# EAGLE board IR_BEACON (EAGLE 6.5.0)
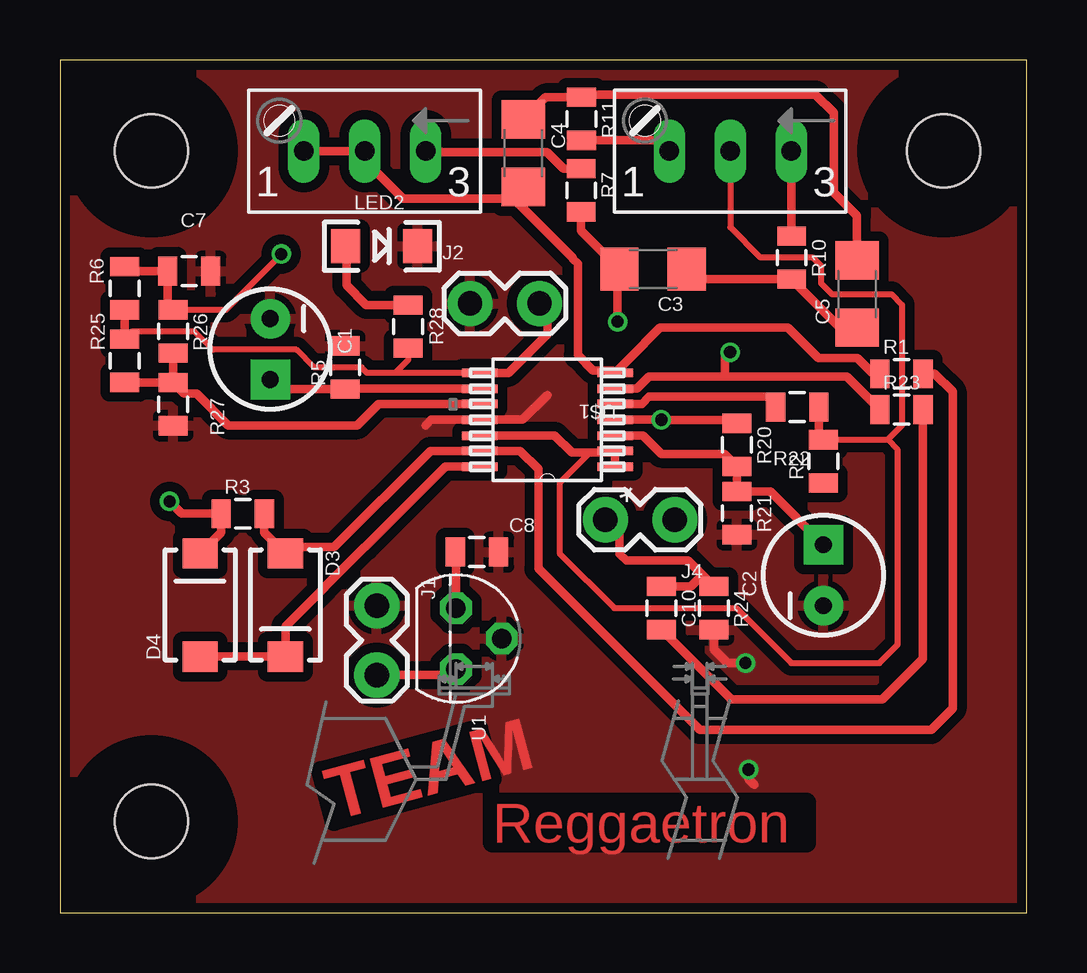
[diagram p0: board, top side]
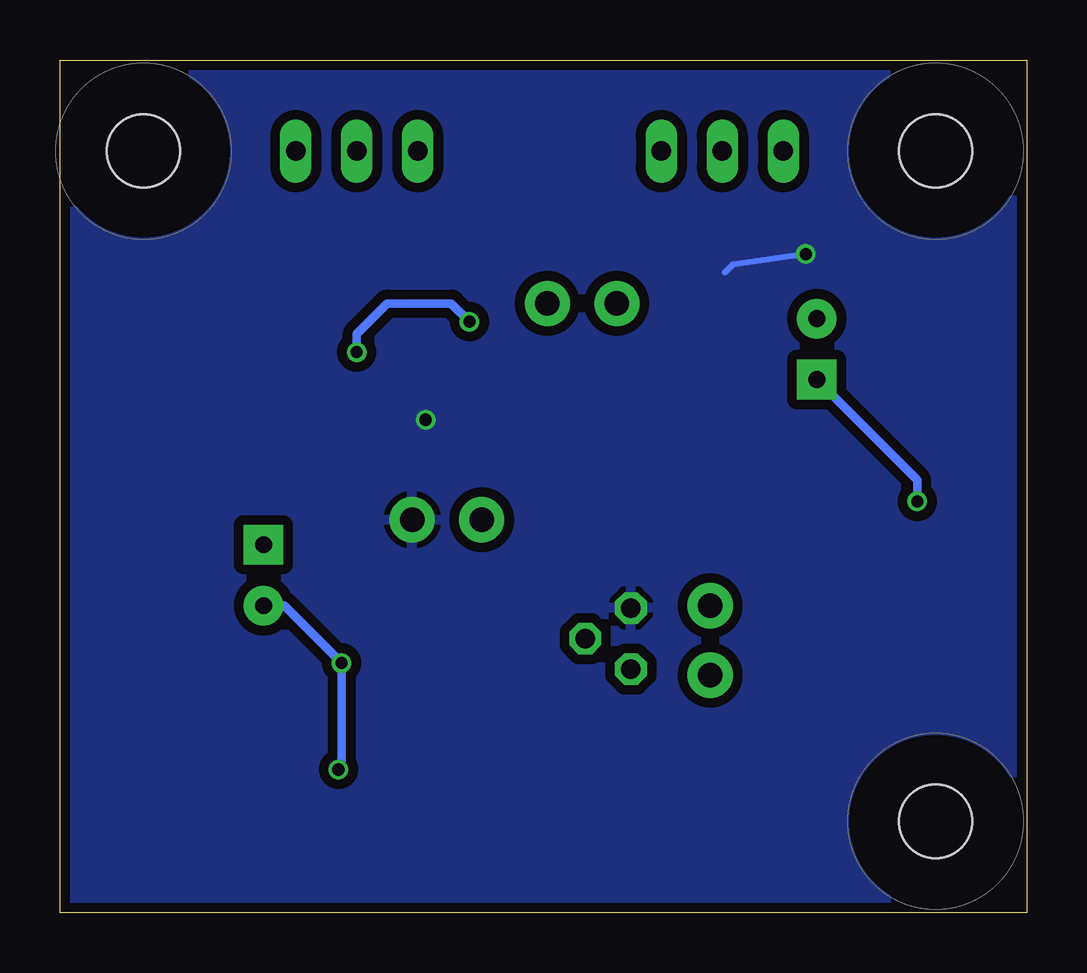
[diagram p1: board, bottom side, seen from below]

Size 40.31 x 35.55 mm. Coordinates in mm from the lower left corner, seen from the top.
Outline: 0,0 40.31,0 40.31,35.55 0,35.55 0,0
Copper layers (1*16): Top 0.035mm / dielectric 1.5mm / Bottom 0.035mm
Design rules "ITEADstudio_DRC": minimum track width 6mil, minimum drill 12mil, track to track 6mil, track to pad 6mil, pad to pad 6mil, via to via 6mil, smd to smd 0mil, copper to edge 10mil, drill to drill 10mil, minimum pad ring 10mil, minimum via ring 6mil, stop-mask expansion 2mil, vias tented up to drill 100mil, thermal gap 10mil

## Footprints (pad centres in the part's own frame; a part is rotated, then mirrored left to right if it is on the bottom)
S64W = drill 0.813 long: A 2.54,1.27; E -2.54,1.27; S 0,1.27
CPOL-RADIAL-10UF-25V = drill 0.7 pad 1.651 square: 1 1.27,0 | drill 0.7 pad 1.651: 2 -1.27,0
1206 = smd 1.6 x 1.8: 1 -1.4,0; 2 1.4,0
0805 = smd 0.8 x 1.2: 1 -0.9,0; 2 0.9,0
SMA-DIODE = smd 1.27 x 1.47: A -2.15,0; C 2.15,0
1X02_LOCK = drill 1.016 pad 1.88: 1 -0.178,0; 2 2.718,0
STAND-OFF-TIGHT = hole 3.048: 0,0
LED-1206 = smd 1.2 x 1.4: A -1.5,0; C 1.5,0
TO92 = drill 0.813 octagon: 1 -1.27,0; 2 0,1.905; 3 1.27,0
TSSOP14_MC = smd 1.473 x 0.356: 1 -2.819,1.956; 2 -2.819,1.295; 3 -2.819,0.66; 4 -2.819,0; 5 -2.819,-0.66; 6 -2.819,-1.295; 7 -2.819,-1.956; 8 2.819,-1.956; 9 2.819,-1.295; 10 2.819,-0.66; 11 2.819,0; 12 2.819,0.66; 13 2.819,1.295; 14 2.819,1.956

## Placement (x,y rotation side)
1K  [S64W]  27.94,33.02 180 top
10K  [S64W]  12.7,33.02 180 top
C1  [CPOL-RADIAL-10UF-25V]  8.76,23.5 270 top
C2  [CPOL-RADIAL-10UF-25V]  31.83,14.07 90 top
C3  47nF  [1206]  24.72,26.83 180 top
C4  47nF  [1206]  19.32,31.66 270 top
C5  47nF  [1206]  33.23,25.79 90 top
C7  .1uF  [0805]  5.38,26.75 0 top
C8  2.2uF  [0805]  17.38,15.04 0 top
C10  100nF  [0805]  25.07,12.7 270 top
D3  DIODE-SCHOTTKY_  [SMA-DIODE]  9.4,12.83 270 top
D4  DIODE-SCHOTTKY_  [SMA-DIODE]  5.84,12.83 90 top
J1  [1X02_LOCK]  13.21,12.62 270 top
J2  [1X02_LOCK]  17.27,25.4 0 top
J4  [1X02_LOCK]  25.45,16.38 180 top
JP1  STAND-OFFTIGHT  [STAND-OFF-TIGHT]  3.81,31.75 0 top
JP3  STAND-OFFTIGHT  [STAND-OFF-TIGHT]  3.81,3.81 0 top
JP5  STAND-OFFTIGHT  [STAND-OFF-TIGHT]  36.83,31.75 0 top
LED2  [LED-1206]  13.41,27.79 0 top
R1  10k  [0805]  35.08,22.47 0 top
R2  10k  [0805]  31.82,18.82 90 top
R3  10k  [0805]  7.62,16.64 0 top
R5  10k  [0805]  11.89,22.73 90 top
R6  3.9k  [0805]  2.7,26.04 270 top
R7  10k  [0805]  21.73,30.12 270 top
R10  100  [0805]  30.5,27.31 270 top
R11  2.2k  [0805]  21.74,33.1 270 top
R20  10k  [0805]  28.22,19.51 270 top
R21  10k  [0805]  28.22,16.66 270 top
R22  20k  [0805]  30.73,21.08 180 top
R23  4.7k  [0805]  35.08,20.98 0 top
R24  2.2k  [0805]  27.25,12.7 270 top
R25  1M  [0805]  2.7,23.01 90 top
R26  100k  [0805]  4.71,24.23 270 top
R27  144k  [0805]  4.72,21.2 270 top
R28  330  [0805]  14.51,24.43 90 top
U1  LP2950-3.0ACZ  [TO92]  16.51,11.43 270 top
U$1  MCP6024-X/ST  [TSSOP14_MC]  20.32,20.55 180 top

## Library data of the parts
1K 10K = pot
C1-C5 C7 C8 C10 D3 D4 J1 J2 J4 JP1 JP3 JP5 LED2 R1-R3 R5-R7 R10 R11 R20-R28 U1 = ASL
U$1 = DRV83x2Support

## Nets
GND: C1.2 C2.2 C7.2 C8.2 J1.1 J2.1 LED2.C R5.2 R21.2 R24.2 R27.2 U1.2 U$1.11
N$1: D3.A R1.2 R3.2 U$1.13
N$2: R2.1
N$4: C3.2 R7.2 R23.1 U$1.6
N$5: 1K.A R11.2
N$6: 10K.E R7.1
N$7: C3.1 C5.1 R10.2
N$8: C4.1 C5.2 R11.1
N$9: 1K.E R10.1
N$15: D3.C D4.A U$1.14
N$16: C2.1 R20.2 R21.1 U$1.3
N$19: R22.2 U$1.5
N$20: C10.2 R23.2
N$21: LED2.A R28.2
V_BIAS: 1K.S R2.2 R22.1 U$1.1 U$1.2 U$1.12
V_ENV1: C1.1 D4.C R3.1 R5.1 U$1.9
V_FILT: 10K.A 10K.S C4.2 R1.1 U$1.7
V_IN: J1.2 U1.3
V_IR: C10.1 J4.2 R24.1
VCC: C7.1 C8.1 J4.1 R6.1 R20.1 R26.1 U1.1 U$1.4
VINC+: R25.1 R26.2 R27.1 U$1.10
VOUTC: J2.2 R6.2 R25.2 R28.1 U$1.8

## Tracks (layer width: path | path; a pad name or v marks a point on that pad's centre or on a via)
GND  (via drill 0.51)
  Top 0.356: 20.32,21.59 19.28,20.55 U$1.11 15.47,20.55 15.24,20.32 | R24.2 27.25,10.97 27.81,10.41 v28.57,10.41 | v28.7,5.97 28.7,5.59 28.96,5.33
  Bottom 0.356: v28.7,5.97 28.57,6.1 v28.57,10.41 30.96,12.8 C2.2
  pour Top (isolate 0.406): 0,35.56 0,0 40.64,0 40.64,35.56
N$1
  Top 0.356: R1.2 36.46,22.47 37.21,21.72 37.21,8.51 36.32,7.62 26.67,7.62 19.94,14.35 19.94,18.49 19.18,19.25 U$1.13 15.45,19.25 11.43,15.24 9.66,15.24 D3.A 8.52,15.86 R3.2
N$4  (via drill 0.51)
  Top 0.356: R7.2 21.73,28.43 C3.2 | U$1.6 24.05,21.84 24.56,22.35 27.71,22.35 | 27.71,22.35 32.81,22.35 R23.1 | 27.71,22.35 27.71,23.14 v27.94,23.37 | v23.24,24.64 23.24,26.75 C3.2 | C3.2 23.02,26.83 22.86,26.67
  Bottom 0.356: v27.94,23.37 27.94,24.13 26.67,25.4 24,25.4 v23.24,24.64
N$5
  Top 0.356: R11.2 24.95,32.2 1K.A
N$6
  Top 0.356: 10K.E 15.85,31.75 15.9,31.7 20.3,31.7 20.98,31.01 R7.1
N$7
  Top 0.356: C5.1 32.52,24.39 R10.2 26.55,26.41 C3.1
N$8
  Top 0.356: C4.1 20.25,34 R11.1 21.86,34.11 31.5,34.11 32.26,33.35 32.26,30.02 33.23,29.05 C5.2
N$9
  Top 0.356: R10.1 30.5,31.73 1K.E
N$15
  Top 0.356: U$1.14 16.08,18.59 12.72,15.24 12.7,15.24 9.4,11.94 D3.C D4.A
N$16
  Top 0.356: U$1.3 24.31,19.89 25.07,19.13 27.7,19.13 R20.2 R21.1 29.61,17.56 C2.1
N$19
  Top 0.356: U$1.5 24.26,21.21 24.56,21.51 29.91,21.51 29.83,21.44 R22.2
N$20
  Top 0.356: R23.2 35.98,10.58 34.29,8.89 27.94,8.89 27.94,8.93 C10.2
N$21
  Top 0.356: R28.2 12.77,25.34 11.94,26.16 11.94,27.76 LED2.A
V_BIAS
  Top 0.254: 1K.S 27.94,28.57 29.18,27.33 31.37,27.33 31.73,26.98 31.73,26.24 32.18,25.78 34.67,25.78 35.1,25.35 35.1,20.32 34.5,19.72 | R2.2 34.5,19.72 | 23.06,19.18 22.1,19.18 20.83,17.91 20.83,14.99 23.11,12.7 28.19,12.7 30.48,10.41 34.16,10.41 34.92,11.18 34.92,19.3 34.5,19.72
  Top 0.356: U$1.12 20.62,19.89 21.34,19.18 23.06,19.18 U$1.2 U$1.1 | R22.1 31.63,19.91 R2.2
V_ENV1  (via drill 0.51)
  Top 0.356: U$1.9 11.9,21.84 R5.1 9.15,21.83 C1.1 | D4.C 6.72,15.86 R3.1 5.08,16.64 v4.57,17.14
  Bottom 0.356: v4.57,17.14 4.57,18.03 C1.1
V_FILT
  Top 0.356: 10K.A 10K.S 12.7,31.37 14.3,29.77 18.82,29.77 | 18.82,29.77 C4.2 | 18.82,29.77 18.9,29.77 21.39,27.28 21.39,27.25 21.59,27.05 21.59,23.24 22.23,22.61 23.04,22.61 U$1.7 | 23.11,22.53 U$1.7 | R1.1 34.15,22.51 33.86,22.51 33.25,23.11 31.62,23.11 30.35,24.38 25.02,24.38 23.72,23.09 U$1.7
V_IN
  Top 0.356: J1.2 16.26,9.91 U1.3
V_IR
  Top 0.356: J4.2 23.33,15.78 23.33,14.96 23.61,14.68 26.17,14.68 26.78,14.08 | 26.78,14.08 R24.1 | C10.1 26.3,13.6 26.78,14.08
VCC  (via drill 0.51)
  Top 0.254: R26.1 6.92,25.14 9.25,27.46 v9.22,27.46
  Top 0.356: 23.11,20.57 U$1.4 24.74,20.55 v25.07,20.55 28.08,20.55 R20.1 | U1.1 16.51,15 C8.1 | R26.1 4.49,25.36 C7.1 2.88,26.75 R6.1
  Bottom 0.254: v9.22,27.46 12.27,27.03 12.6,26.7
  pour Bottom (isolate 0.406): 0,35.56 0,0 40.64,0 40.64,35.56
VINC+
  Top 0.356: U$1.10 13.29,21.21 12.39,20.32 7.01,20.32 5.69,21.64 5.18,21.64 R27.1 | R25.1 4.71,22.11 R27.1 | R27.1 R26.2
VOUTC
  Top 0.254: U$1.8 13.97,22.51 | 13.97,22.51 12.8,22.51 12.57,22.73 10.59,22.73 9.86,23.47 6.38,23.47 5.61,24.23 3.02,24.23 R25.2 | R28.1 14.51,23.05 13.97,22.51
  Top 0.356: U$1.8 18.7,22.51 20.32,24.13 20.32,25.07 J2.2 | R6.2 R25.2

## Text on the board
Top: TEAM | Reggaetron